# EAGLE board riffle-0.96-usb-tab (EAGLE 7.3.0)
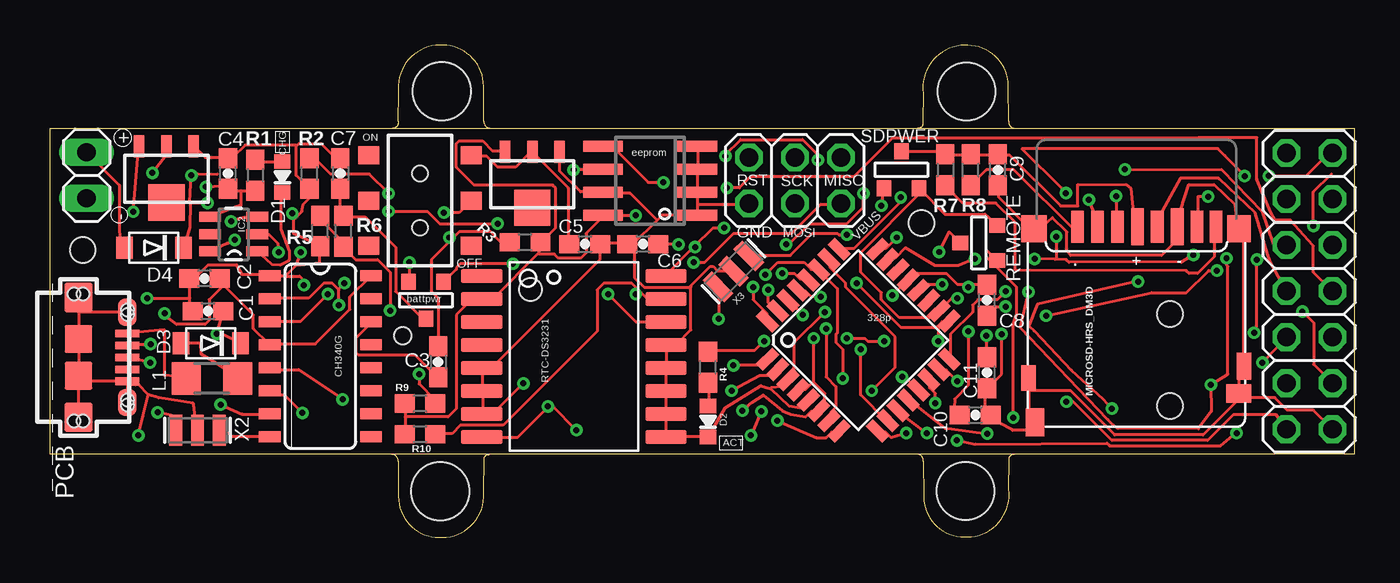
[diagram p0: board, top side]
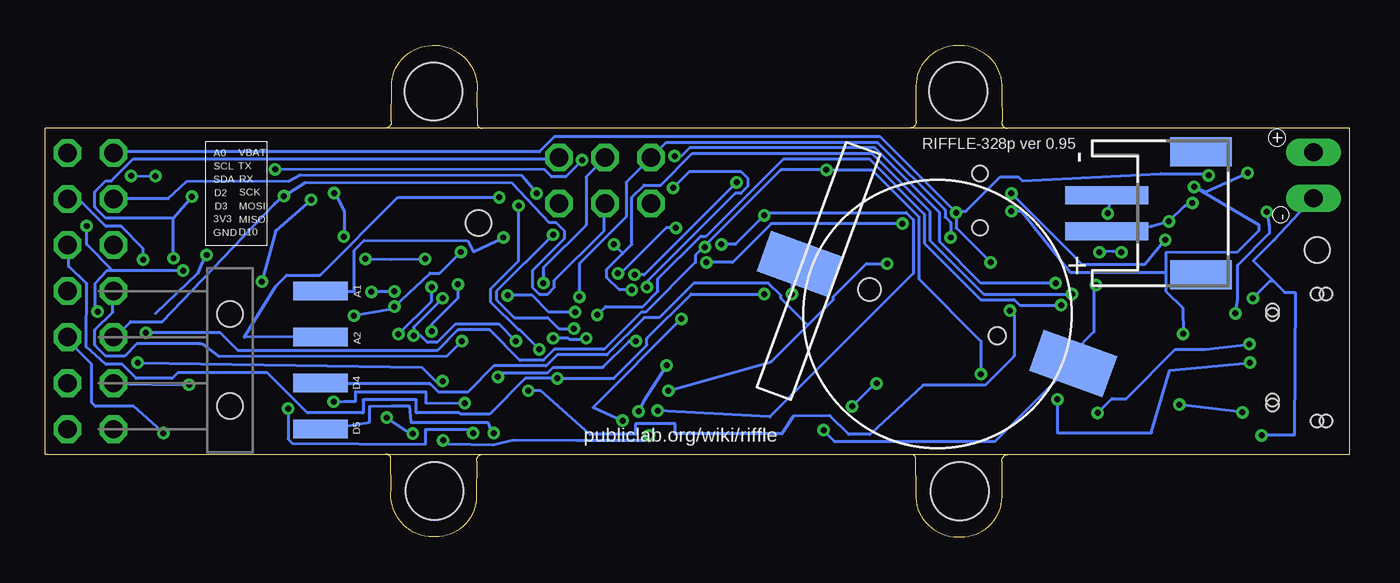
[diagram p1: board, bottom side, seen from below]

Size 72 x 27.16 mm. Coordinates in mm from the lower left corner, seen from the top.
Outline: 48.16,22.95 48.18,24.52 arc-90 50.24,27.15 50.63,27.15 arc-90 52.88,24.91 52.9,22.96 52.9,22.94 arc90 53.25,22.58
Outline: 48.16,22.95 48.16,22.8 arc-90 47.88,22.59
Outline: 19.18,22.95 19.2,24.53 arc-90 21.27,27.16 21.66,27.16 arc-90 23.91,24.91 23.92,22.97 23.92,22.94 arc90 24.28,22.59
Outline: 19.19,22.95 19.19,22.81 arc-90 18.9,22.59
Outline: 23.94,4.21 23.92,2.63 arc-90 21.85,0 21.46,0 arc-90 19.21,2.25 19.2,4.19 19.2,4.22 arc90 18.84,4.57
Outline: 23.93,4.21 23.93,4.35 arc-90 24.22,4.57
Outline: 52.93,4.23 52.91,2.65 arc-90 50.84,0.02 50.45,0.02 arc-90 48.2,2.27 48.19,4.21 48.19,4.24 arc90 47.84,4.59
Outline: 52.93,4.23 52.93,4.37 arc-90 53.21,4.59
Outline: 0,4.59 0,22.59 72,22.59 72,4.59 0,4.59
Copper layers (1*16): Top 0.0356mm / dielectric 1.5011mm / Bottom 0.0356mm
Design rules "LaenPCBOrder": minimum track width 6mil, minimum drill 13mil, track to track 6mil, track to pad 6mil, pad to pad 6mil, via to via 6mil, smd to smd 6mil, copper to edge 15mil, drill to drill 6mil, minimum pad ring 7mil, minimum via ring 7mil, stop-mask expansion 3mil, vias tented up to drill 0mil, thermal gap 10mil
Net classes: 2 gnd: width 0.254 mm, drill 0.61 mm, clearance 0.254 mm
Holes 1.4 mm at 48.08,17.35 1.78,15.86
Holes 3.2 mm at 50.57,24.61 21.6,24.62 21.52,2.54 50.52,2.56

## Footprints (pad centres in the part's own frame; a part is rotated, then mirrored left to right if it is on the bottom)
BATTCON_12MM_SMT = smd 2.4 x 4.3: P$1 0,11.96 | smd 2.4 x 4.2: P$2 0,-4.1 | hole 0.95: 0,7.5 | hole 1.25: 0,0
SOT-23 = smd 0.787 x 0.889: 1 0.025,-1.016; 2 -0.94,1.016; 3 0.991,1.016
0603-CAP = smd 1.1 x 1: 1 -0.85,0; 2 0.85,0
JST-PH-2-SMT-RA = smd 1 x 4.6: 1 1,-3.7; 2 -1,-3.7 | smd 1.6 x 3.4: NC1 -3.4,1.5; NC2 3.4,1.5
0603-LED = smd 0.8 x 0.9: MINUS -0.85,0; PLUS 0.85,0
SOD-123FL = smd 0.91 x 1.22: A 1.637,0; C -1.637,0
TQFP32-08 = smd 1.27 x 0.559: 1 -4.293,2.8; 2 -4.293,2; 3 -4.293,1.2; 4 -4.293,0.4; 5 -4.293,-0.4; 6 -4.293,-1.2; 7 -4.293,-2; 8 -4.293,-2.8; 17 4.293,-2.8; 18 4.293,-2; 19 4.293,-1.2; 20 4.293,-0.4; 21 4.293,0.4; 22 4.293,1.2; 23 4.293,2; 24 4.293,2.8 | smd 0.559 x 1.27: 9 -2.8,-4.293; 10 -2,-4.293; 11 -1.2,-4.293; 12 -0.4,-4.293; 13 0.4,-4.293; 14 1.2,-4.293; 15 2,-4.293; 16 2.8,-4.293; 25 2.8,4.293; 26 2,4.293; 27 1.2,4.293; 28 0.4,4.293; 29 -0.4,4.293; 30 -1.2,4.293; 31 -2,4.293; 32 -2.8,4.293
SOT23-5 = smd 0.55 x 1.2: 1 -0.95,-1.3; 2 0,-1.3; 3 0.95,-1.3; 4 0.95,1.3; 5 -0.95,1.3; 6 0,1.3
SO16 = smd 0.6 x 1.2: 1 -4.445,-2.8; 2 -3.175,-2.8; 3 -1.905,-2.8; 4 -0.635,-2.8; 5 0.635,-2.8; 6 1.905,-2.8; 7 3.175,-2.8; 8 4.445,-2.8; 9 4.445,2.8; 10 3.175,2.8; 11 1.905,2.8; 12 0.635,2.8; 13 -0.635,2.8; 14 -1.905,2.8; 15 -3.175,2.8; 16 -4.445,2.8
SOT89 = smd 0.58 x 1.2: 1 -1.5,-1.8; 2 0,-1.8; 3 1.5,-1.8 | smd 2 x 2: 4 0,1.3
SO-08 = smd 0.6 x 2.2: 1 -1.905,-2.6; 2 -0.635,-2.6; 3 0.635,-2.6; 4 1.905,-2.6; 5 1.905,2.6; 6 0.635,2.6; 7 -0.635,2.6; 8 -1.905,2.6
2X03 = drill 1.016 octagon: 1 -2.54,-1.27; 2 -2.54,1.27; 3 0,-1.27; 4 0,1.27; 5 2.54,-1.27; 6 2.54,1.27
AYZ0202 = smd 1 x 1.15: 1 -2.5,2.825; 2 0,2.825; 3 2.5,2.825; 4 -2.5,-2.825; 5 0,-2.825; 6 2.5,-2.825 | hole 0.85: 1.5,0; -1.5,0
CON2_USB_MICRO_B_AT = smd 0.406 x 1.346: P1 -1.321,2.692; P2 -0.66,2.692; P3 0,2.692; P4 0.66,2.692; P5 1.321,2.692 | smd 1.651 x 1.549: S1 -3.302,0; S2 3.302,0 | smd 1.524 x 1.016: S3 -2.489,2.692; S4 2.489,2.692 | smd 1.524 x 1.524: S5 -1.016,0; S6 1.016,0 | hole 0.7: -3.505,0.254; -3.505,-0.254; 3.505,0.254; 3.505,-0.254; -2.616,2.692; -2.362,2.692; 2.362,2.692; 2.616,2.692
1X02 = drill 1.016 long: 1 -1.27,0; 2 1.27,0
1X04-SMD = smd 1 x 3: 1 -3.81,5; 2 -1.27,5; 3 1.27,5; 4 3.81,5 | hole 1.4: -2.54,0; 2.54,0
2X07 = drill 1.016 octagon: 1 -7.62,-1.27; 2 -7.62,1.27; 3 -5.08,-1.27; 4 -5.08,1.27; 5 -2.54,-1.27; 6 -2.54,1.27; 7 0,-1.27; 8 0,1.27; 9 2.54,-1.27; 10 2.54,1.27; 11 5.08,-1.27; 12 5.08,1.27; 13 7.62,-1.27; 14 7.62,1.27
R1206 = smd 1.6 x 1.803: 1 -1.422,0; 2 1.422,0
0603-NO = smd 1.1 x 1: 1 -0.85,0; 2 0.85,0
DS3231 = smd 0.762 x 2.286: 1 -4.445,-5.08; 2 -3.175,-5.08; 3 -1.905,-5.08; 4 -0.635,-5.08; 5 0.635,-5.08; 6 1.905,-5.08; 7 3.175,-5.08; 8 4.445,-5.08; 9 4.445,5.08; 10 3.175,5.08; 11 1.905,5.08; 12 0.635,5.08; 13 -0.635,5.08; 14 -1.905,5.08; 15 -3.175,5.08; 16 -4.445,5.08
DM3D = smd 0.7 x 1.75: CD/DAT3 8.15,0.45; CLK 4.85,0.45; CMD 7.05,0.45; DAT0 2.65,0.45; DAT1 1.6,0.45; DAT2 9.25,0.45 | smd 0.8 x 1.5: GND1 0.05,8.15 | smd 0.8 x 1.4: GND2 11.95,8.8 | smd 1.4 x 1.5: GND3 11.65,0.55 | smd 1.3 x 1.5: GND4 0.35,0.55 | smd 1 x 1.55: SW_A 11.6,11.25 | smd 1.4 x 1: SW_B 0.35,9.65 | smd 0.7 x 2.032: VDD 5.95,0.45; VSS 3.75,0.45
RESONATOR-SMD = smd 0.7 x 1.7: 1 -1.2,0; 2 0,0; 3 1.2,0

## Placement (x,y rotation side)
BAT  CR1220  [BATTCON_12MM_SMT]  26.5,13.69 250 bottom
BATTPOWER  FDN340P  [SOT-23]  20.7,13.09 0 top
C1  10uF  [0603-CAP]  8.7,12.49 0 top
C2  0.1uF  [0603-CAP]  8.5,14.29 180 top
C3  0.1uF  [0603-CAP]  21.4,9.69 270 top
C4  10uF  [0603-CAP]  9.8,20.09 90 top
C5  10uF  [0603-CAP]  29.5,16.19 0 top
C6  10uF  [0603-CAP]  32.7,16.19 180 top
C7  0.1uF  [0603-CAP]  16,20.09 270 top
C8  0.1uF  [0603-CAP]  51.7,13.09 90 top
C9  0.1uF  [0603-CAP]  52.3,20.29 90 top
C10  0.1uF  [0603-CAP]  51.06,6.75 0 top
C11  0.1uF  [0603-CAP]  51.7,9.09 90 top
CN1  [JST-PH-2-SMT-RA]  9.7,17.89 270 bottom
D1  LED0603  [0603-LED]  12.8,19.89 90 top
D2  LED0603  [0603-LED]  36.3,6.39 90 top
D3  SCHOTTKY  [SOD-123FL]  8.85,10.71 180 top
D4  SCHOTTKY  [SOD-123FL]  5.71,15.98 180 top
IC1  ATMEGA328P  [TQFP32-08]  44.6,10.89 45 top
IC2  MCP73831  [SOT23-5]  10.11,16.74 90 top
IC3  CH340G  [SO16]  14.9,9.99 270 top
IC4  MCP1700-33  [SOT89]  26.6,19.49 180 top
IC5  24AA128SN  [SO-08]  33.1,19.69 90 top
IC6  MCP1700-33  [SOT89]  6.4,19.79 180 top
ISP  [2X03]  41.1,19.69 180 top
J1  AYZ0202  [AYZ0202]  20.4,18.59 270 top
J2  USB MICRO  [CON2_USB_MICRO_B_AT]  1.55,9.93 270 top
JP1  [1X02]  2,19.99 90 top
JP3  [1X04-SMD]  61.8,9.79 270 bottom
JP5  [2X07]  69.5,13.59 90 top
L1  500mA  [R1206]  8.9,8.77 0 top
R1  10K  [0603-NO]  11.3,19.99 270 top
R2  4.7K  [0603-NO]  14.3,20.09 90 top
R3  10K  [0603-NO]  26.2,16.29 0 top
R4  10K  [0603-NO]  36.3,9.39 90 top
R5  10K  [0603-NO]  14.89,16.91 90 top
R6  10K  [0603-NO]  16.18,16.9 90 top
R7  50K  [0603-NO]  49.4,20.29 270 top
R8  50K  [0603-NO]  50.8,20.29 90 top
R9  10K  [0603-NO]  20.4,7.39 180 top
R10  10K  [0603-NO]  20.4,5.69 180 top
REMOTE  FDN340P  [SOT-23]  51.25,16.28 270 top
RTC-DS3231  DS3231  [DS3231]  28.9,9.99 270 top
SDPWER  FDN340P  [SOT-23]  47,20.29 180 top
U$1  MICROSD-HRS_DM3D  [DM3D]  65.95,17.59 180 top
X2  12MHz  [RESONATOR-SMD]  8.12,5.91 0 top
X3  16 MHz  [RESONATOR-SMD]  37.7,14.69 225 top

## Library data of the parts
BAT IC2 IC3 J1 X2 = SparkFunNew
BATTPOWER REMOTE SDPWER = zetex; OC_FARNELL: unknown; OC_NEWARK: unknown
C1-C11 JP3 X3 = SparkFun
CN1 D3 D4 IC4 IC6 L1 = adafruit
D1 D2 = LowPowerLab
IC1 = atmel; MPN: ATMEGA8-16AU; OC_FARNELL: 9171371; OC_NEWARK: 73M8863
IC5 = microchip; MF: MICROCHIP; MPN: 24AA128-I/SN; OC_FARNELL: unknown; OC_NEWARK: 92C6842
ISP JP1 JP5 = pinhead
J2 = SmartPrj
R1-R10 = microbuilder
RTC-DS3231 = _lh-library
U$1 = hrs_DM3D-SF

## Nets
A0: IC1.23 JP5.13
A1: IC1.24 JP3.1
A2: IC1.25 JP3.2
A3: IC1.26 R5.2 R6.1
AREF: C10.1 IC1.20
D2: IC1.32 JP5.7
D3: IC1.1 JP5.5
D4: BATTPOWER.3 IC1.2 JP3.3
D5: IC1.9 JP3.4
D6: IC1.10 SDPWER.3
D7: IC1.11 U$1.CD/DAT3
D8: IC1.12 REMOTE.3
D9: IC1.13 R4.2
D10: IC1.14 JP5.2
D+: IC3.5 J2.P3
D-: IC3.6 J2.P2
GND: BAT.P$1 C1.1 C2.2 C4.2 C5.2 C6.2 C7.1 C8.2 C9.1 C10.2 C11.1 CN1.2 D2.MINUS IC1.3 IC1.5 IC1.21 IC2.2 IC3.1 IC4.1 IC5.1 IC5.2 IC5.3 IC5.4 IC5.7 IC6.1 ISP.6 J2.P5 J2.S1 J2.S2 J2.S3 J2.S4 J2.S5 J2.S6 JP1.1 JP5.1 R2.1 R5.1 RTC-DS3231.5 RTC-DS3231.6 RTC-DS3231.7 RTC-DS3231.8 RTC-DS3231.9 RTC-DS3231.10 RTC-DS3231.11 RTC-DS3231.12 RTC-DS3231.13 U$1.GND1 U$1.GND2 U$1.GND3 U$1.GND4 U$1.SW_A U$1.SW_B U$1.VSS X2.2 X3.2
MISO: IC1.16 ISP.1 JP5.4 U$1.DAT0
MOSI: IC1.15 ISP.4 JP5.6 U$1.CMD
N$1: D1.PLUS R1.1
N$2: IC1.7 X3.1
N$3: IC1.8 X3.3
N$4: C9.2 R7.1 R8.2 SDPWER.1 U$1.VDD
N$5: D1.MINUS IC2.1
N$6: IC2.5 R2.2
N$7: C8.1 JP5.3 REMOTE.1
N$8: C2.1 IC3.4 IC3.16 IC6.3
N$10: D3.A L1.2
N$11: IC3.7 X2.1
N$13: IC3.8 X2.3
N$14: D4.A JP1.2
N$15: BATTPOWER.1 C7.2 R6.2
N$16: R7.2 U$1.DAT1
N$17: D2.PLUS R4.1
N$18: R8.1 U$1.DAT2
N$19: J2.P1 L1.1
RESET: C3.1 IC1.29 ISP.5 R3.1
RST: C3.2 IC3.14
RTC_BATT: BAT.P$2 RTC-DS3231.14
RXD: IC1.30 IC3.2 JP5.10
SCK: IC1.17 ISP.3 JP5.8 U$1.CLK
SCL: IC1.28 IC5.6 JP5.11 R9.1 RTC-DS3231.16
SDA: IC1.27 IC5.5 JP5.9 R10.1 RTC-DS3231.15
TXD: IC1.31 IC3.3 JP5.12
VBAT [vcc]: BATTPOWER.2 CN1.1 D4.C IC2.3 J1.2 JP5.14
VBUS [vcc]: C1.2 C4.1 D3.C IC2.4 IC6.2 ISP.2 R1.2
VCC: C6.1 C11.2 IC1.4 IC1.6 IC1.18 IC4.3 IC5.8 R3.2 R9.2 R10.2 REMOTE.2 RTC-DS3231.2 SDPWER.2
VDD: C5.1 IC4.2 J1.1

## Tracks (layer width: path | path; a pad name or v marks a point on that pad's centre or on a via)
A0  (via drill 0.33)
  Top 0.152: v51.03,15.37 50.11,15 48.83,15 47.19,15.98 46.63,15.41 46.25,15.41 IC1.23 | 55.45,15.34 56.08,15.33 56.24,15.18 62.43,15.2 62.43,15.18 v63.09,15.58 | 55.45,15.34 v54.33,15.37 | JP5.13 70.57,21.21 69.29,19.93 67.6,19.94 v67.26,19.95 | v65.93,19.94 65.94,19.95 64.83,21.06 64.83,21.07 64.45,21.45 55.73,21.45 53.62,21.44 55.83,19.27 v56.06,19 | v55.52,16.6 55.51,15.41 55.45,15.34
  Bottom 0.152: v51.03,15.37 52.9,15.34 v54.33,15.37 | 65.91,12.36 63.55,14.59 63.3,15.18 v63.09,15.58 | v67.26,19.95 66.06,19.94 v65.93,19.94 | v56.06,19 55.99,19 55.49,17.99 55.49,16.56 v55.52,16.6
A1  (via drill 0.33)
  Top 0.152: v46.71,16.55 46.1,15.94 45.72,15.94 IC1.24
  Bottom 0.152: v46.71,16.55 48.37,15.78 48.69,16.36 54.39,16.38 54.94,15.84 54.94,13.58 56.33,13.58 56.77,13.65 JP3.1
A2  (via drill 0.33)
  Top 0.152: v46.94,18.76 46.94,18.53 44.35,15.94 43.59,15.94 IC1.25
  Bottom 0.152: v46.94,18.76 52.54,18.76 56.83,14.47 58.67,14.47 59.28,13.86 61.01,11.04 57.38,11.06 56.84,11.06 JP3.2
A3  (via drill 0.33)
  Top 0.152: R5.2 14.71,17.69 14.83,17.62 16.2,16.25 R6.1 16.15,16.02 16.84,15.33 18.06,15.33 18.75,14.64 v18.75,12.51 | v45.34,8.09 46.63,9.39 46.63,11.06 43.89,13.81 43.89,14.04 43.05,14.87 43.05,15.33 IC1.26
  Bottom 0.152: v45.34,8.09 44.65,8.09 41.94,5.68 39.42,5.68 39.42,6.26 37.24,6.26 37.24,5.7 31.33,5.7 30.7,6.69 28.69,6.72 27.65,5.68 26.47,5.68 23.55,8.4 20.12,8.4 18.52,10 18.52,12.28 v18.75,12.51
AREF  (via drill 0.33)
  Top 0.152: v50.67,11.37 50.67,8.4 49.91,7.63 49.86,6.75 C10.1 | v49.23,13.96 48.23,13.96 47.93,13.65 IC1.20
  Bottom 0.152: v50.67,11.37 50.67,11.75 49.23,13.2 v49.23,13.96
D2  (via drill 0.33)
  Top 0.152: v38.79,13.81 38.79,13.12 39.55,12.36 39.55,11.98 IC1.32 | v37.34,19.29 38.02,19.29 38.63,19.9 44.35,19.9 46.48,22.04 63.4,22.04 63.36,22.05 66.6,22.06 66.6,19.78 67.36,17.95 67.61,17.52 68.45,17.52 69.72,16.09 69.72,14.64 70.71,13.65 JP5.7
  Bottom 0.152: v38.79,13.81 38.79,14.11 33.91,18.99 33.6,18.99 33.22,19.37 33.22,19.83 33.6,20.21 36.42,20.21 v37.34,19.29
D3  (via drill 0.33)
  Top 0.152: IC1.1 39.24,9.49 v37.7,9.49 | v39.24,6.95 38.76,5.86 v38.66,5.62 | v50.04,5.35 51.05,5.15 58.32,5.2 58.47,5.04 64.59,5.04 65.28,5.6 v65.48,5.75
  Bottom 0.152: v37.7,9.49 38.99,7.49 v39.24,6.95 | v38.66,5.62 38.99,5.34 42.67,5.34 46.16,5.35 47.3,5.09 49.73,5.15 49.94,5.35 v50.04,5.35 | v65.48,5.75 65.58,5.86 67.11,7.23 69.24,7.23 69.44,7.43 69.44,9.56 70.77,10.89 JP5.5
D4  (via drill 0.33)
  Top 0.152: v25.53,15.1 22.63,15.1 22.4,14.87 22.4,14.8 21.72,14.11 BATTPOWER.3 | v37.6,8.09 39.17,8.93 39.78,8.93 40.08,9.23 IC1.2
  Bottom 0.152: v25.53,15.1 26.67,15.1 28.5,13.27 28.5,13.12 29.91,11.71 | 29.91,11.71 31.93,9.69 v37.6,8.09 | 29.91,11.71 31.39,13.2 31.39,13.35 32.08,14.04 36.2,14.04 38.1,12.13 38.94,12.13 41,10.07 43.74,10.07 44.35,9.46 47.24,9.46 48.69,8.02 50.29,8.02 50.75,8.47 56.77,8.47 JP3.3
D5  (via drill 0.33)
  Top 0.152: v47.24,5.75 46.41,5.5 46.1,5.81 45.72,5.81 IC1.9
  Bottom 0.152: v47.24,5.75 47.4,5.91 47.57,6.34 51.82,6.36 51.92,7.25 52.88,7.25 54.03,7.23 54.1,7.23 54.1,6.36 55.98,6.06 56.77,6.03 JP3.4
D6  (via drill 0.33)
  Top 0.152: v45.87,18.3 45.95,18.38 45.95,19.22 SDPWER.3 | v44.73,10.38 44.73,7.86 46.18,6.42 IC1.10
  Bottom 0.152: v45.87,18.3 45.87,15.25 47.4,13.73 47.4,12.97 45.87,11.44 45.8,11.44 v44.73,10.38
D7  (via drill 0.33)
  Top 0.152: v48.39,5.75 46.79,6.95 IC1.11 | v58.6,7.1 58.09,7.66 56.36,9.23 54.3,11.39 54,11.67 54.48,12.87 60.01,14.12 v60.05,14.11 | v57.33,18.63 57.99,17.08 57.76,16.85 U$1.CD/DAT3
  Bottom 0.152: v48.39,5.75 48.74,5.96 51,5.96 51,5.15 58.37,5.2 58.6,5.42 v58.6,7.1 | v60.05,14.11 59.28,16.93 v57.33,18.63
D8  (via drill 0.33)
  Top 0.152: v53.15,6.61 53.15,8.47 53.14,11.76 53.33,12.26 53.34,12.31 53.34,13.81 51.66,15.48 51.66,15.86 REMOTE.3 | v51.71,5.73 49.73,5.98 49.38,6.01 47.4,7.56 IC1.12
  Bottom 0.152: v53.15,6.61 51.89,5.75 v51.71,5.73
D9  (via drill 0.33)
  Top 0.152: v39.4,10.83 38.86,10.3 36.35,10.3 R4.2 | v47.02,8.85 47.17,8.85 47.85,8.17 IC1.13
  Bottom 0.152: v39.4,10.83 39.78,10.83 41.22,9.39 43.97,9.39 44.27,9.08 46.79,9.08 v47.02,8.85
D10  (via drill 0.33)
  Top 0.152: v48.84,7.41 48.84,7.94 48.54,8.24 48.54,8.63 IC1.14 | v56.08,7.48 56.46,7.48 58.6,5.35 63.88,5.35 65.3,6.77 67.67,6.77 68.2,5.96 JP5.2
  Bottom 0.152: v48.84,7.41 51,7.43 51,8.04 54.86,8.04 54.86,7.51 55.5,7.51 v56.08,7.48
D+  (via drill 0.33)
  Top 0.152: IC3.5 12.19,9.26 13.7,9.26 v16.13,7.61 | v5.5,9.64 5.36,9.69 4.3,9.92 J2.P3
  Bottom 0.152: v16.13,7.61 16.13,5.77 10.94,5.77 9.92,9.22 v5.5,9.64
D-  (via drill 0.33)
  Top 0.152: IC3.6 12.31,7.88 12.9,7.88 v13.91,6.87 | v5.52,10.67 5.34,10.63 4.24,10.63 J2.P2
  Bottom 0.152: v13.91,6.87 13.12,7.66 12.33,7.66 9.61,10.38 7.95,10.38 v5.52,10.67
GND  (via drill 0.33)
  Top 0.152: 50.67,13.96 50.06,13.96 49.45,14.57 47.7,14.57 47.4,14.26 IC1.21 47.32,14.19 v46.48,13.35 | 50.67,13.96 51.66,13.96 C8.2 | 54.03,8.09 54.03,6.34 54.25,6.11 U$1.SW_A 54.12,5.91 53.11,5.91 53.09,5.93 51.66,6.69 C10.2 51.59,6.85 51.59,8.09 51.66,8.17 C11.1 51.74,8.24 52.5,9.01 v52.5,11.22 | 54.03,8.09 54.03,8.47 U$1.GND2 54.03,8.09 | v50.67,13.81 50.67,13.96 | U$1.SW_B 65.61,7.71 65.61,8.85 65.84,9.08 U$1.GND1 65.84,9.16 65.84,16.47 65.61,16.7 U$1.GND4 65.53,16.78 65.38,18.38 64.24,19.47 62.84,19.47 62.18,17.39 62.18,16.85 U$1.VSS 62.1,16.78 62.1,16.32 61.34,15.56 56.31,15.56 56.11,15.81 56.11,16.85 55.31,17.64 54.25,16.7 U$1.GND3 54.18,16.78 54.18,16.93 52.35,18.76 52.35,19.37 C9.1 | U$1.SW_B 65.68,7.71 67.59,7.71 68.28,7.02 69.72,7.02 70.71,6.03 JP5.1 | 54.03,8.09 56.31,8.09 58.75,5.65 63.63,5.65 65.53,7.56 U$1.SW_B | 7.7,13.2 7.7,12.66 7.85,12.51 C1.1 | 7.7,13.2 7.7,14.26 C2.2 7.77,14.26 7.92,14.26 8.69,15.03 10.29,15.03 10.58,14.51 12.04,14.49 IC3.1 | v5.33,13.2 7.7,13.2 | IC6.1 7.92,21.58 8.53,20.97 9.75,20.97 C4.2 9.83,20.97 10.06,20.97 10.74,21.66 13.56,21.66 13.6,21.62 | 12.12,14.42 IC3.1 | 14.8,16.17 13.41,16.78 13.41,17.5 13.6,17.69 | 14.8,16.17 14.72,16.14 14.63,16.09 R5.1 | 13.6,17.69 13.88,17.97 13.95,18.38 14.25,18.68 14.25,19.22 R2.1 14.25,19.29 13.56,19.98 13.56,21.58 13.6,21.62 | 13.6,21.62 13.72,21.73 14.94,21.73 15.7,20.97 15.93,20.97 C7.1 | 12.95,14.42 12.19,14.42 IC3.1 | 13.53,14.99 14.83,15.14 14.82,16.09 14.8,16.17 | 13.53,14.99 12.95,14.42 | 35.36,13.81 35.36,11.44 34.59,10.68 33.98,10.68 RTC-DS3231.13 33.98,10.61 33.98,9.39 RTC-DS3231.12 33.98,9.31 RTC-DS3231.11 33.98,8.02 33.98,6.87 RTC-DS3231.10 33.98,6.8 33.98,5.65 RTC-DS3231.9 33.98,5.58 36.27,5.58 D2.MINUS 36.35,5.58 37.26,7.15 39.22,8.37 39.76,8.21
  Top 0.152: 35.36,13.81 35.36,13.88 36.42,14.95 36.58,14.95 36.8,14.72 37.64,14.72 X3.2 | 39.76,8.21 39.78,8.24 40.39,8.32 40.69,8.63 IC1.3 40.77,8.7 41.07,9.01 41.07,10.76 v42.75,12.44 | 39.76,8.21 40.77,7.25 41.4,7.15 41.83,7.56 IC1.5 | IC4.1 28.12,21.27 28.12,20.21 29.26,19.06 30.48,19.06 IC5.7 30.56,18.99 32,18.99 33.49,17.5 | IC5.4 35.74,21.58 35.74,20.36 IC5.3 35.74,20.28 35.74,19.06 IC5.2 35.74,18.99 35.74,18.38 | C6.2 31.77,16.25 30.4,16.25 C5.2 30.33,16.17 30.33,15.33 24.31,9.31 23.93,9.31 RTC-DS3231.5 23.85,9.31 23.85,8.09 RTC-DS3231.6 23.85,8.02 23.85,6.87 RTC-DS3231.7 24.43,6.81 v26.11,8.5 | 33.49,17.5 33.76,17.77 35.66,17.77 IC5.1 35.74,17.85 35.74,18.38 | 33.49,17.5 32.16,16.17 31.93,16.17 C6.2 | 35.74,18.38 38.56,18.38 ISP.6 | 35.36,13.81 32.77,13.81 32.23,14.34 32.23,16.17 C6.2 | X2.2 8.04,5.91 7.92,7.13 7.89,7.39 5.97,7.7 5.38,7.86 | 5.38,7.86 4.88,8.43 4.68,8.42 4.24,8.42 J2.P5 | v4.85,5.63 5.11,6.66 5.38,7.86 | RTC-DS3231.8 23.84,5.53 25.81,5.53 27.46,7.18 v27.46,7.23 27.72,7.23 v29.03,5.92 | 12.95,14.42 13.75,14.42 13.99,14.17 v13.99,13.92 | v13.35,17.88 13.6,17.75 13.6,17.69 | IC2.2 12.05,16.73 12.56,16.22 v12.6,15.74 | v13.8,15.74 13.53,15.01 13.53,14.99 | J2.P5 1.55,8.61 J2.S6 | J2.S2 J2.S6 | J2.S6 J2.S5 J2.S1 1.55,12.42 J2.S3 | J2.P5 J2.S4
  Bottom 0.152: v50.67,13.81 50.67,13.04 v52.5,11.22 | JP1.1 2.06,18.68 4.15,16.42 5.31,15.25 4.2,14.15 | v46.48,13.35 45.11,13.35 44.2,12.44 v42.75,12.44 | 4.2,14.15 3.58,13.53 3.47,13.53 3.01,13.51 3.05,5.64 4.85,5.64 v4.85,5.63 | v5.33,13.2 4.38,14.15 4.2,14.15 | v27.46,7.23 26.19,8.5 v26.11,8.5 | v13.99,13.92 14.11,13.81 14.11,11.34 15.26,10.19 BAT.P$1 19.57,5.29 28.42,5.29 | 28.43,5.29 28.42,5.29 | 28.42,5.29 29.03,5.89 v29.03,5.92 | CN1.2 13.22,18.71 v13.35,17.88 | v12.6,15.74 13.06,15.79 v13.8,15.74
MISO  (via drill 0.33)
  Top 0.152: v52.73,13.58 52.27,13.12 51.21,13.12 50.9,12.82 50.9,12.44 49.68,11.22 49.68,9.84 IC1.16 | v54,13.55 53.54,11.57 58.37,6.49 58.67,6.19 58.93,6.01 63.37,5.98 64.08,6.95 v64.06,8.42 65,9.01 65,14.95 64.92,15.03 v64.92,15.41 | v63.91,18.81 63.35,18.81 63.32,17.46 63.32,16.85 U$1.DAT0
  Bottom 0.152: v52.73,13.58 53.57,13.58 v54,13.55 | v64.06,8.42 68.2,8.47 JP5.4 | v64.92,15.41 64.92,17.62 | 64.92,17.62 v63.91,18.81 | 64.92,17.62 68.66,17.62 69.27,18.23 69.27,19.06 68.66,19.67 68.35,19.67 67.13,20.89 43.66,20.89 ISP.1
MOSI  (via drill 0.33)
  Top 0.152: v50.06,8.63 49.45,9.23 49.07,9.23 IC1.15 | v66.9,9.64 68.2,10.99 JP5.6 | v58.83,18.84 58.83,16.85 U$1.CMD
  Bottom 0.152: v50.06,8.63 50.44,8.63 51.21,9.39 v66.9,9.64 | JP5.6 68.2,10.99 67.28,11.9 65.53,11.9 59.36,18.38 v58.83,18.84 57.63,19.6 46.24,19.56 44.2,17.39 43.81,17.39 43.36,16.93 43.36,16.47 45.11,14.72 45.11,13.81 44.73,13.43 44.27,13.43 43.89,13.81 43.89,14.19 41.15,16.93 41.15,18.38 ISP.4
N$1
  Top 0.152: D1.PLUS 12.72,20.74 11.43,20.74 11.35,20.82 R1.1
N$2  (via drill 0.33)
  Top 0.152: v42.82,11.52 42.82,8.85 43.36,8.32 43.36,7.18 43.05,6.87 43.05,6.49 IC1.7 | v43.97,16.7 43.51,16.7 43.43,16.78 42.06,16.78 40.84,15.56 38.56,15.56 X3.1
  Bottom 0.152: v42.82,11.52 43.66,11.52 44.27,12.13 46.1,12.13 47.09,13.12 47.09,13.58 v43.97,16.7
N$3  (via drill 0.33)
  Top 0.152: v40.13,6.44 42.29,5.5 42.82,5.5 43.13,5.81 43.51,5.81 IC1.8 | v36.88,12.05 36.88,13.81 X3.3
  Bottom 0.152: v40.13,6.44 41.76,7.18 v36.88,12.05
N$4
  Top 0.152: SDPWER.1 47.02,21.27 49.3,21.27 49.38,21.2 R7.1 49.45,21.12 50.75,21.12 R8.2 50.83,21.12 52.27,21.12 C9.2 52.35,21.12 52.93,21.11 55.77,18.29 56.72,18.29 56.72,19.48 59.38,19.47 59.64,19.27 59.89,16.85 U$1.VDD
N$5
  Top 0.152: D1.MINUS 12.72,18.99 12.75,18.57 12.74,18.05 12.74,16.99 13.21,15.8 13.21,15.44 13.18,15.31 12.68,15.04 12.22,15.06 IC2.1
N$6  (via drill 0.33)
  Top 0.152: v18.67,18.99 17.6,20.06 15.47,20.06 14.63,20.89 14.33,20.89 R2.2 | v10.17,16.42 9.78,16.23 IC2.5
  Bottom 0.152: v18.67,18.99 15.54,15.86 14.76,15.05 11.3,15.05 v10.17,16.42
N$7  (via drill 0.33)
  Top 0.152: v49.06,15.75 49.61,16.85 REMOTE.1 | v52.73,12.74 52.2,12.74 51.74,12.28 C8.1 | 70.71,20.06 69.72,19.06 v69.72,17.18 | v64.39,14.72 63.93,14.72 62.71,13.5 60.8,13.5 v54.97,12.23 | v69.11,12.46 69.3,12.28 69.74,11.85 69.74,9.54 JP5.3
  Bottom 0.152: v49.06,15.75 50.23,14.58 50.76,14.58 v52.73,12.74 52.88,12.59 v54.97,12.23 | v69.72,17.18 69.72,16.17 68.28,14.72 | v64.39,14.72 68.28,14.72 | 68.28,14.72 68.61,14.72 69.27,14.01 69.28,12.35 v69.11,12.46
N$8  (via drill 0.33)
  Top 0.152: v4.57,17.97 4.88,21.58 IC6.3 | v6.3,12.36 6.53,12.1 6.96,11.75 8.53,11.75 8.76,11.98 8.76,13.12 9.53,13.88 C2.1 9.37,14.26 9.37,14.11 11.2,12.28 11.2,11.52 12.04,10.68 IC3.4 12.12,10.68 14.63,10.68 16.54,12.59 16.54,13.27 17.68,14.42 IC3.16
  Bottom 0.152: v6.3,12.36 6.17,13.12 6.17,15.03 4.42,16.78 4.45,17.21 v4.57,17.97
N$10
  Top 0.152: D3.A 7.43,10.71 8.31,10.71 8.32,10.11 8.8,9.83 9.77,9.22 L1.2
N$11  (via drill 0.33)
  Top 0.152: v9.4,7.33 10.59,6.8 12.04,6.8 IC3.7 | v5.92,6.9 6.66,6.75 7.16,6.03 X2.1
  Bottom 0.152: v5.92,6.9 v9.4,7.33
N$13
  Top 0.152: IC3.8 12.04,5.58 9.98,5.58 9.6,5.96 X2.3
N$14
  Top 0.152: JP1.2 2.06,21.2 3.81,19.45 3.81,16.89 3.89,16.26 4.07,16.08 D4.A
N$15
  Top 0.152: BATTPOWER.1 20.65,12.13 20.5,12.13 19.05,13.58 19.05,16.02 17.37,17.69 16.15,17.69 R6.2 16.08,17.77 16,17.85 16,19.22 C7.2
N$16
  Top 0.152: R7.2 49.45,19.37 50.37,18.45 52.2,18.45 53.26,17.39 53.26,14.75 62.71,14.72 62.87,14.57 63.32,14.57 64.24,15.48 64.24,16.78 U$1.DAT1
N$17
  Top 0.152: D2.PLUS 36.35,7.25 36.35,8.47 R4.1
N$18
  Top 0.152: R8.1 50.83,19.45 51.66,20.28 53.19,20.28 56.62,16.85 U$1.DAT2
N$19
  Top 0.152: L1.1 6.81,8.88 6.33,8.94 6.3,8.94 | 6.3,8.97 6.29,8.94 6.3,8.94 | 6.3,8.97 6.29,8.93 | 6.3,8.94 6.3,8.97 | 6.3,8.97 6.3,11.46 4.28,11.27 J2.P1
RESET  (via drill 0.33)
  Top 0.152: 22.14,16.44 22.55,16.85 24.31,16.85 24.84,16.32 25.3,16.32 R3.1 | 22.14,16.44 21.03,15.33 21.03,13.58 21.41,13.2 21.41,10.61 C3.1 | v42.52,13.27 41.99,13.27 41.68,13.58 41.3,13.58 IC1.29 | v22.02,16.55 22.14,16.44
  Bottom 0.152: v42.52,13.27 42.52,15.1 39.93,17.69 39.93,19.6 38.63,20.89 ISP.5 38.56,20.97 37.72,21.81 26.06,21.81 22.33,18.07 22.33,17.69 22.02,17.39 v22.02,16.55
RST
  Top 0.152: C3.2 21.34,8.85 20.12,10.07 16.99,10.07 16.84,10.23 16.84,10.99 17.68,11.83 IC3.14
RTC_BATT  (via drill 0.33)
  Top 0.152: v30.79,13.43 32.31,11.9 33.91,11.9 RTC-DS3231.14
  Bottom 0.152: v30.79,13.43 30.79,14.64 30.4,15.03 BAT.P$2
RXD  (via drill 0.33)
  Top 0.152: 15.89,13.69 15.93,13.65 v15.93,12.82 | 15.89,13.69 15.54,14.04 15.09,14.04 14.25,13.2 12.12,13.2 IC3.2 | v41.53,12.28 40.77,13.04 IC1.30 | v59.31,20.31 64.66,20.3 66.89,17.99 66.9,17.97 66.9,17.95 67.51,16.17 68.2,16.17 JP5.10 | v42.37,20.82 42.37,21.12 41.53,21.96 38.1,21.96 37.26,21.12 v37.26,21.05 | 15.89,13.69 v16.23,14.04
  Bottom 0.152: v15.93,12.82 18.21,12.82 18.52,13.12 20.34,13.12 23.47,16.25 23.47,17.85 26.52,20.89 31.24,20.89 35.51,16.63 35.81,16.63 38.18,14.26 38.18,13.58 39.01,12.74 41.07,12.74 v41.53,12.28 | v59.31,20.31 44.42,20.28 44.04,19.9 43.28,19.9 v42.37,20.82 | v37.26,21.05 36.88,21.05 36.42,21.5 26.21,21.5 22.63,17.92 22.63,16.32 20.34,14.04 v16.23,14.04
SCK  (via drill 0.33)
  Top 0.152: U$1.CLK 61.11,16.85 61.11,17.54 62.38,19.83 64.5,19.81 64.52,19.79 66.03,18.37 66.5,17.92 67.21,15.58 67.36,15.15 68.2,13.65 JP5.8 | 48.96,11.63 48.92,11.6 46.94,11.6 v44.5,14.04 | 48.96,11.63 49.23,11.9 49.61,11.9 IC1.17 | v49,10.83 49,11.6 48.96,11.63
  Bottom 0.152: v44.5,14.04 44.5,14.87 42.14,17.24 42.14,19.9 41.15,20.89 ISP.3 | v49,10.83 49.84,10 62.38,9.97 63.25,10.63 63.45,10.68 66.95,10.68 67.61,10 68.66,10 69.27,10.61 69.27,11.44 68.28,12.44 68.28,13.58 JP5.8
SCL  (via drill 0.33)
  Top 0.152: v40.39,14.57 41.07,14.57 41.38,14.26 41.83,14.26 IC1.28 | v37.19,17.08 36.58,17.08 35.55,16.05 | 35.55,16.05 33.98,14.49 RTC-DS3231.16 | v20.34,9.01 20.34,8.47 21.18,7.63 21.18,7.41 R9.1 | v28.88,20.28 30.48,20.28 IC5.6 | v66.6,15.33 66.6,11.44 v66.45,11.29 | v35.59,16.02 35.55,16.05
  Bottom 0.152: v40.39,14.57 40.23,14.57 37.72,17.08 v37.19,17.08 | v20.34,9.01 20.34,10.83 23.77,14.26 23.77,17.69 26.36,20.28 v28.88,20.28 31.39,20.28 35.62,16.05 | v66.6,15.33 66.6,15.94 67.82,17.16 68.66,17.16 70.1,18.61 70.71,18.61 JP5.11 | v66.45,11.29 62.33,11.29 61.34,10.3 50.37,10.3 49.23,11.44 47.47,11.44 45.8,9.77 44.5,9.77 43.89,10.38 41.15,10.38 39.09,12.44 38.86,12.44 36.12,15.18 36.12,15.56 35.62,16.05 | v35.59,16.02 35.62,16.05
SDA  (via drill 0.33)
  Top 0.152: 32.5,13.62 32.92,13.2 33.91,13.2 RTC-DS3231.15 | 32.5,13.62 32.08,14.04 30.56,14.04 30.18,13.65 30.18,11.37 24.99,6.19 22.63,6.19 22.17,5.73 21.26,5.73 R10.1 | v39.47,14.49 40.16,15.18 41.6,15.18 41.99,14.8 42.37,14.8 IC1.27 42.44,14.72 43.43,13.73 43.43,11.29 43.36,11.22 43.36,10.76 43.74,10.38 v43.74,8.78 | v33.83,19.6 32.99,19.6 31.01,21.58 30.56,21.58 IC5.5 | v32.31,13.43 32.5,13.62
  Bottom 0.152: v39.47,14.49 38.94,14.49 v33.83,19.6 | JP5.9 70.71,16.09 70.71,14.95 69.71,14 69.75,10.52 68.66,9.54 67.74,9.54 66.98,8.78 65,8.78 64.69,9.08 59.74,9.08 57.53,6.87 54.46,6.87 54.46,7.58 51.51,7.58 51.51,6.87 49.15,6.87 49.07,6.8 47.47,6.8 45.49,8.78 v43.74,8.78 40.62,8.78 38.79,10.61 38.79,10.99 36.35,13.43 v32.31,13.43
TXD  (via drill 0.33)
  Top 0.152: v15.32,13.43 13.79,11.9 12.12,11.9 IC3.3 | v39.62,13.65 39.62,12.97 40.08,12.51 IC1.31 | v44.88,18.99 44.88,18.23 43.97,17.31 41.91,17.31 40.77,16.17 v40.62,16.17
  Bottom 0.152: v15.32,13.43 20.19,13.43 23.16,16.4 23.16,18 26.36,21.2 36.27,21.2 38.02,19.45 38.94,19.45 39.62,18.76 39.62,16.17 40.12,15.67 | 40.12,15.67 41,14.8 41,14.34 40.31,13.65 v39.62,13.65 | v44.88,18.99 45.7,19.97 57.91,19.99 57.94,19.99 58.53,19.65 64.21,19.64 65.23,18.68 68.2,18.68 JP5.12 | 40.12,15.67 v40.62,16.17
VBAT  (via drill 0.33)
  Top 0.152: 7.77,19.99 7.7,18.53 7.71,18.45 | 7.77,19.99 8.06,20.07 8.14,20.07 9.22,20.06 | v19.81,15.18 19.81,14.11 BATTPOWER.2 | v21.72,17.92 22.55,17.92 23.16,18.53 J1.2 | v7.79,19.98 7.77,19.99 | 7.71,18.45 7.7,17.11 D4.C | v9.97,17.44 10.35,17.58 10.63,17.67 10.88,17.67 IC2.3 | v8.67,18.45 7.71,18.45
  Bottom 0.152: v19.81,15.18 21.72,17.08 v21.72,17.92 | v21.72,17.92 25.91,22.11 43.89,22.11 44.73,21.27 68.2,21.27 JP5.14 | v7.79,19.98 7.89,20.08 10.44,20.08 18.06,19.67 18.29,19.9 19.28,19.9 21.18,18 21.72,18 v21.72,17.92 | CN1.1 13.25,17.03 10.95,17.18 10.77,17.22 v9.97,17.44 9.09,18.32 v8.67,18.45
VBUS  (via drill 0.33)
  Top 0.152: v8.59,19.34 8.7,19.33 8.65,19.33 9.8,19.39 C4.1 9.75,19.14 10.52,19.14 | C1.2 9.53,12.44 9.5,12.33 v9.18,11.23 9.44,11.23 D3.C | 10.52,19.14 11.28,19.14 R1.2 | 10.52,19.14 10.52,18.33 IC2.4 | v5.63,20.12 6.4,21.12 IC6.2 | v35.51,15.18 36.12,15.18 37.72,16.78 40.92,16.78 42.52,18.38 43.59,18.38 ISP.2 | v24.69,17.31 21.49,17.31 20.8,18 v18.67,18
  Bottom 0.152: v9.18,11.23 9.22,12.66 10.13,13.58 10.15,14.61 | 10.15,14.61 10.13,15.71 6.2,15.74 5.02,16.92 5.02,17.26 v8.59,19.34 7.92,19.06 v5.63,20.12 | v35.51,15.18 34.06,15.18 31.93,17.31 v24.69,17.31 | v18.67,18 18.14,18 15.4,14.61 10.15,14.61
VCC  (via drill 0.33)
  Top 0.152: 19.58,6.64 19.58,7.33 R9.2 | 19.58,6.64 19.58,5.73 R10.2 | 26.94,15.67 24.46,13.2 23.85,13.2 RTC-DS3231.2 23.77,13.12 23.24,13.12 22.4,12.28 22.4,7.1 21.95,6.64 19.58,6.64 | 26.94,15.67 26.98,15.71 26.98,16.25 R3.2 27.05,16.25 27.89,17.08 27.89,19.29 27.74,19.45 23.39,19.45 22.4,20.44 22.4,21.73 22.55,21.88 23.85,21.88 24.38,21.35 25.07,21.35 IC4.3 | REMOTE.2 51.59,17.85 49.38,17.85 48.01,19.22 SDPWER.2 48.08,19.06 44.73,15.71 44.73,14.64 45.87,13.5 45.87,13.12 46.86,12.13 48.69,12.13 49,12.44 IC1.18 49.07,12.51 49.76,13.2 v50.06,13.2 | v51.66,11.14 51.66,10 C11.2 | 42.14,8.47 42.22,8.47 42.75,7.94 42.75,7.33 42.44,7.02 IC1.6 42.37,6.95 41.99,6.95 41.68,6.64 40.86,6.78 40.4,6.99 39.34,7.85 38.75,7.45 v38.2,7 | 42.14,8.47 41.99,8.47 41.68,8.17 41.3,8.17 IC1.4 | v34.67,16.17 33.6,16.17 C6.1 | v32.31,17.77 30.56,17.77 IC5.8 | 30.48,17.77 IC5.8 | v46.02,10.83 45.11,10.83 44.96,10.99 v43.97,10.99 | 42.14,8.47 v42.14,10.99 | 26.94,15.67 26.98,15.64 27.81,15.64 28.04,15.41 29.26,15.41 29.57,15.71 29.57,16.78 30.48,17.69 IC5.8
  Bottom 0.152: v50.06,13.2 51.66,11.6 v51.66,11.14 51.28,11.14 50.9,10.76 50.37,10.76 49.38,11.75 46.94,11.75 v46.02,10.83 | v34.67,16.17 33.91,16.17 v32.31,17.77 32.16,17.92 24.46,17.92 24.08,17.54 24.08,14.57 32,6.64 v38.2,7 | v43.97,10.99 43.13,10.99 43.05,10.91 42.22,10.91 v42.14,10.99
VDD
  Top 0.152: C5.1 28.57,16.25 28.57,19.29 26.59,21.27 IC4.2 26.52,21.27 25.68,20.44 24.69,20.44 24.08,21.05 23.24,21.05 J1.1

## Text on the board
tPlace: CHG | + | ON | eeprom | RST | SCK | MISO | - | IC2 | GND | MOSI | VBUS | OFF | battpwr | 328p | CH340G | X2 | ACT
bPlace: + | RIFFLE-328p ver 0.95 | VBAT | TX | A0 | SCL | RX | SDA | SCK | D2 | - | MISO | MOSI | D3 | 3V3 | D10 | GND | A1 | A2 | D4 | D5 | publiclab.org/wiki/riffle